# Altium PCB Solar_Charger2.PcbDoc
Units mil, origin at the board's own origin, x right, y up, seen from the top; angles counter-clockwise.
Board outline 3005 x 1655 mil, 2 copper layers (Top Layer, Bottom Layer); 24 components, 16 nets, 57 pads, 5 vias.
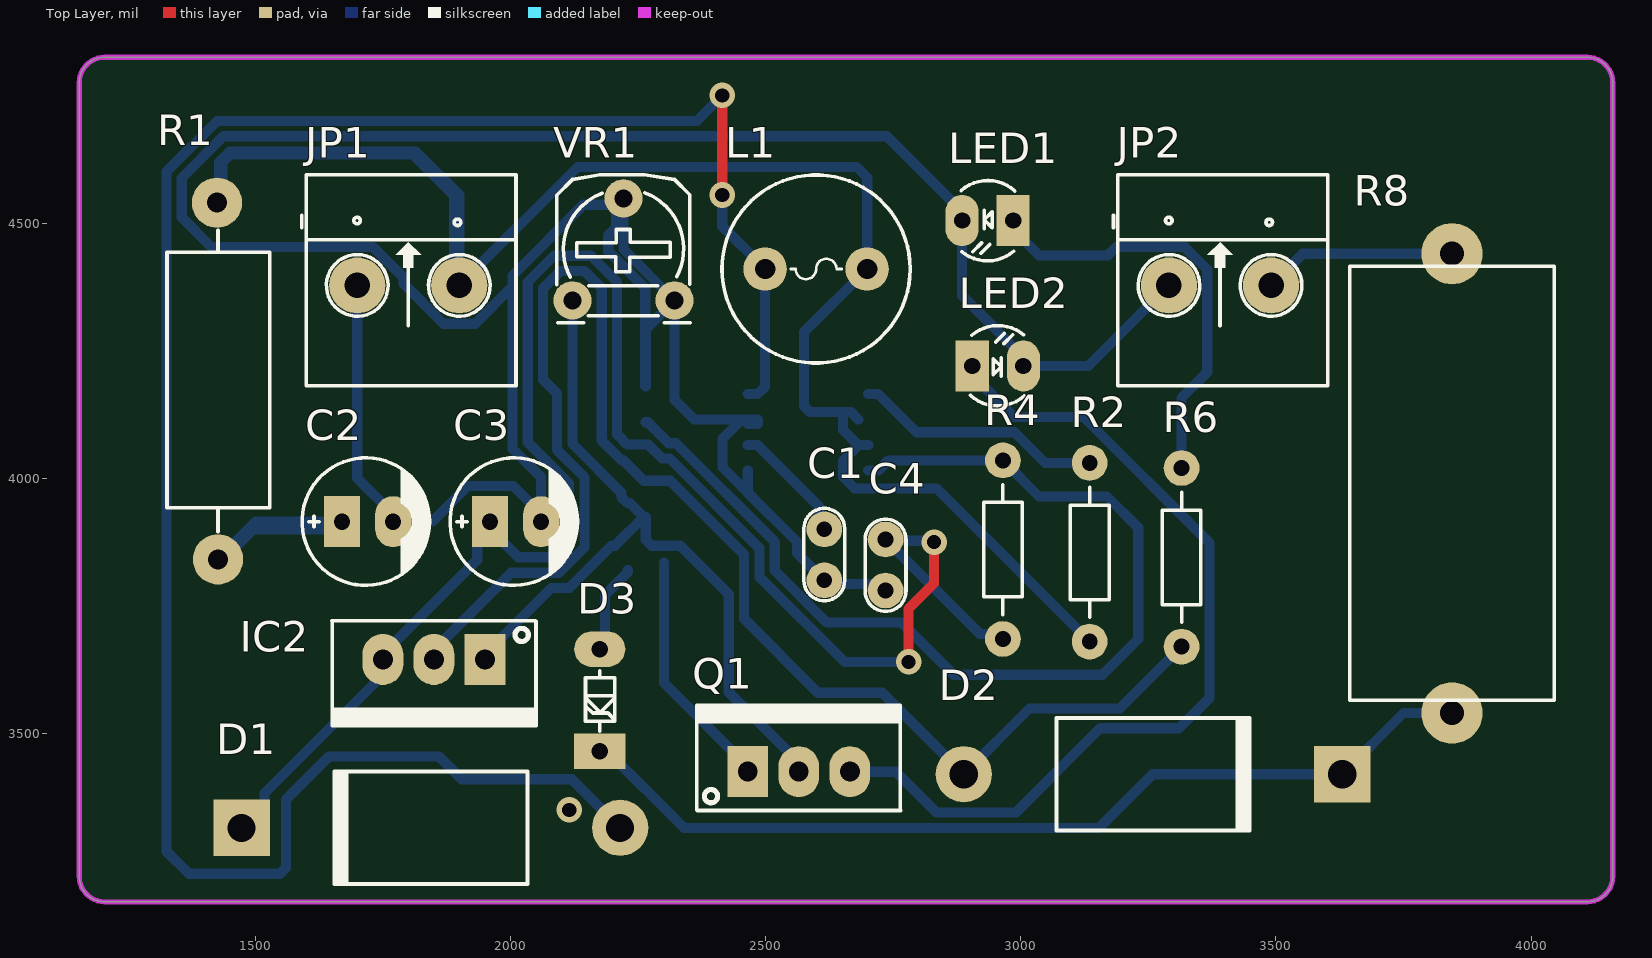
[diagram p0: Top Layer view]
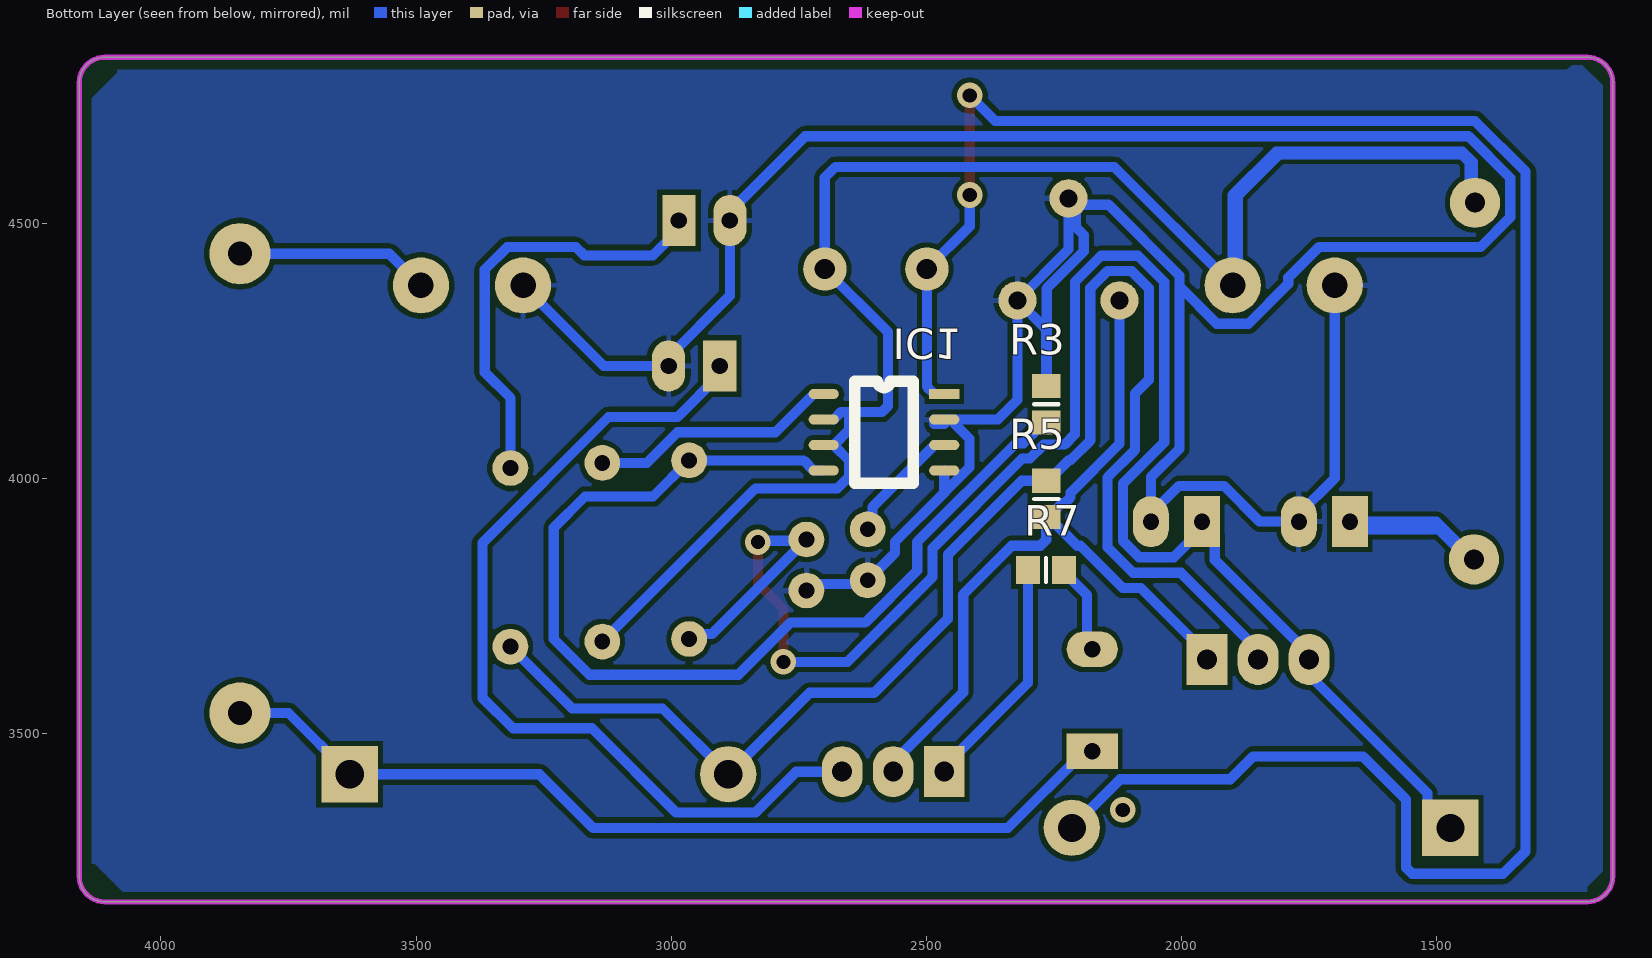
[diagram p1: Bottom Layer view, seen from below]
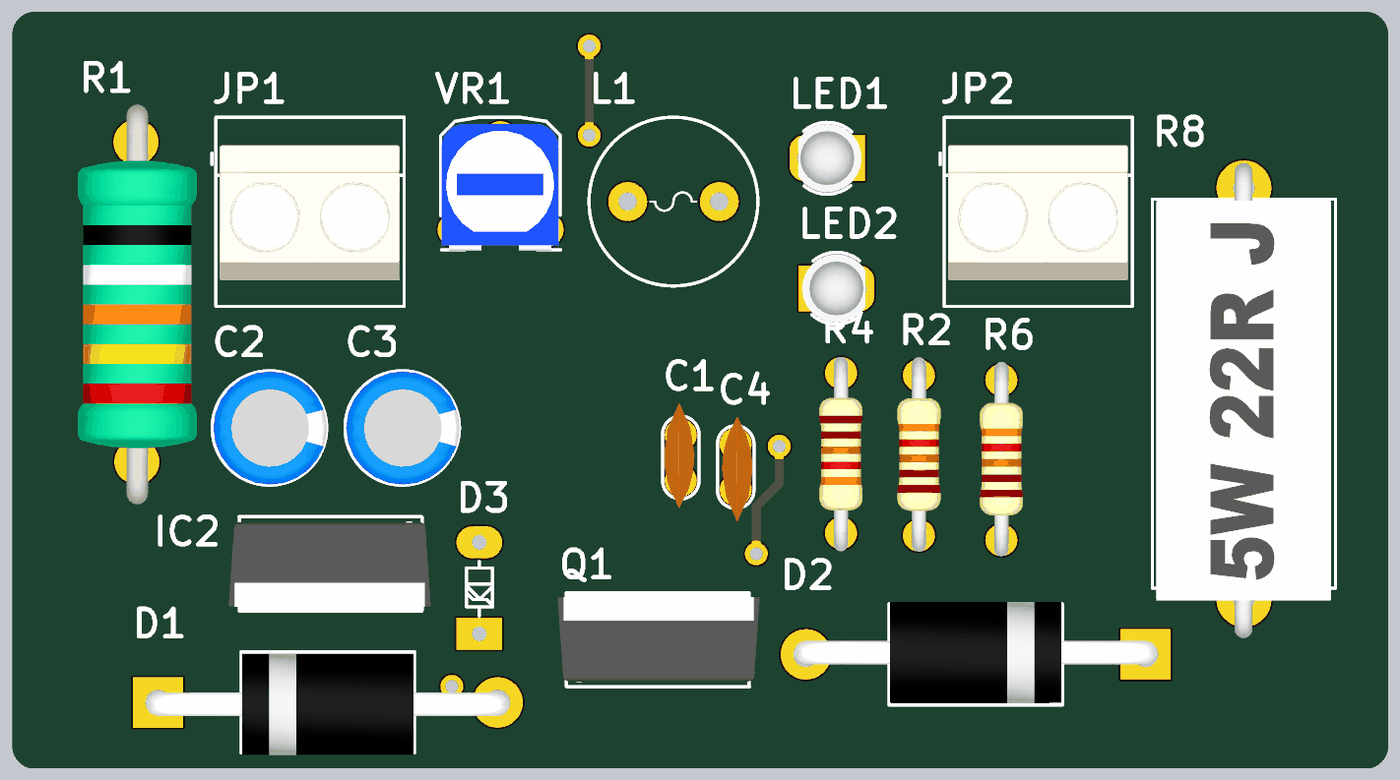
[diagram p2: 3D render of the assembled board from above, using the file's embedded part models]
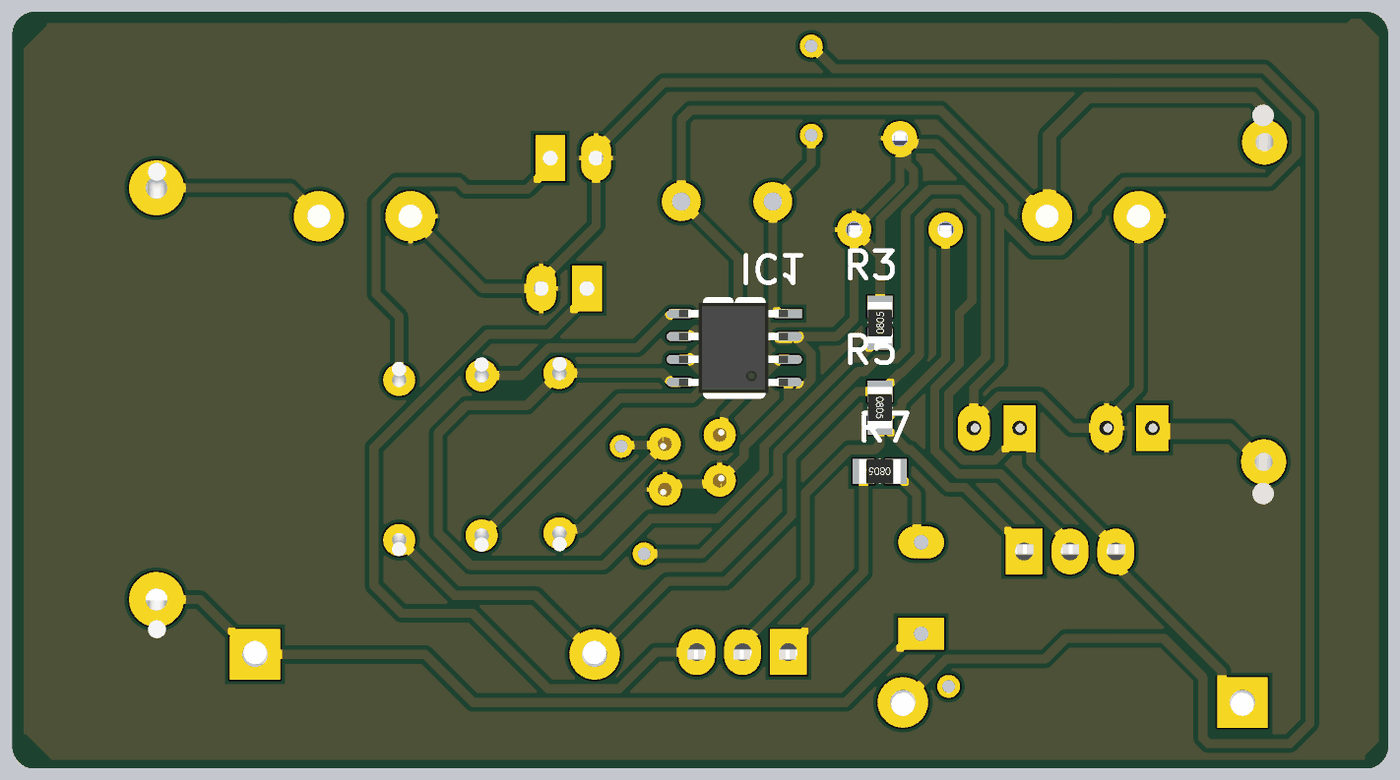
[diagram p3: 3D render of the assembled board from below, using the file's embedded part models]

## Layer stack, top to bottom
Top Solder: solder mask 0.4, Solder Resist, Dk 3.5
Top Layer: signal copper 1.4
Dielectric 1: dielectric 12.6, FR-4, Dk 4.8
Bottom Layer: signal copper 1.4
Bottom Solder: solder mask 0.4, Solder Resist, Dk 3.5

## Board outline
1205,3170 cw(c1205,3220) 1155,3220 1155,4775 cw(c1205,4775) 1205,4825 4110,4825 cw(c4110,4775) 4160,4775 4160,3220 cw(c4110,3220) 4110,3170

## Design rules (kind name [scope] priority, off if disabled: settings)
Clearance [All] p1: gap=10 ignorepadtopadclearanceinfootprint=FALSE except(0: Arc-Hole Track-Hole SMDPad-Hole THPad-Hole Via-Hole Fill-Hole Poly-Hole Region-Hole Text-Hole)
PolygonConnect [All] p1: connectstyle=Relief reliefconductorwidth=10 reliefentries=4 polygonreliefangle="90 Angle" airgapwidth=10
RoutingVias [All] p1: holewidth=28 width=50 viastyle="Through Hole" minholewidth=28 minwidth=50 maxholewidth=28 maxwidth=50
SilkToSolderMaskClearance [IsText] p1: minsilkscreentomaskgap=10 clearancetoexposedcopper=TRUE
SolderMaskExpansion [All] p1: expansion=4 istentingtop=FALSE
Width [All] p1: maxlimit=30 minlimit=15 preferedwidth=20
29 further rules are at their usual default settings.

## Components (designator, comment, footprint, x,y, rotation, side; value= is the part's Value field where it differs from the comment)
C1 "270pF" CN1 2615,3800 r90 top value=100pF
C2 "100uF" CP1/2.5 1670,3915 r0 top value="47uF/16 - 50V"
C3 "100uF" CP1/2.5 1960,3915 r0 top value="47uF/16 - 50V"
C4 "100 nF" CN1 2735,3880 r270 top value=100pF
D1 "1N5819" DO-201 2215,3315 r180 top
D2 "1N4007" DO-201 2888.27,3420 r0 top
D3 "6V/0.5W" DZ0.5A 2175,3665 r90 top value=3v3
IC1 "MC34063" SOP8 2465,4165 r0 bottom
IC2 "LM317" QTO-220 1950,3645 r180 top
JP1 "Header 2_1" HED2 1699.79,4377.86 r0 top value="Header 2"
JP2 "Header 2_1" HED2 3290.37,4377.86 r0 top value="Header 2"
L1 "330mH" L01 2598.96,4410 r180 top value="150 mH"
LED1 "LED" LED-3 2985,4505 r180 top value="LED 3 ly Single Colour"
LED2 "LED" LED-3 2905,4220 r0 top value="LED 3 ly Single Colour"
Q1 "BD139" QTO-220 2465,3425 r0 top
R1 "0.3 Ohm/2W" R2W 1427,3841 r90 top value="R2W - 47"
R2 "180 Ohm" R1/4W 3135,4030 r270 top value="R1/4W - 1K"
R3 "1k" 0805_Res 2265,4145 r90 bottom value="R1/4W - 1K"
R4 "4k" R1/4W 2965,3685 r90 top value="R1/4W - 1K"
R5 "1k" 0805_Res 2265,3959.57 r270 bottom value="R1/4W - 1K"
R6 "4k" R1/4W 3315,4020 r270 top value="R1/4W - 1K"
R7 "1k" 0805_Res 2265.43,3820 r0 bottom value="R1/4W - 1K"
R8 "R6W - 1k" R5W 3845,3540 r90 top value="R5W - 0,47R"
VR1 "1K" VR 2121.5,4348.39 r0 top value="VR 10K"

## Footprints (in the part's own frame and the unit in brackets; to place one, negate y for a bottom-side part, rotate by r counter-clockwise, add the part's x,y. Pads: shape width x height; smd on the part's side, far side on the other; paste and mask are expansions set on the pad)
0805_Res [mm] "Chip Resistor, Body 2.0x1.2mm, IPC Medium Density"
  rect 1.2x1.4 smd: 1(-0.9,0) 2(0.9,0)
  silkscreen extent 0,-0.6 0,0.6, body extent -1.15,-0.67 1.15,0.67, height 0.76
CN1 [mil]
  round 70 hole 31: 1(0,0) 2(100,0)
  silkscreen extent -40,-40 141,40, body extent -60,-30 170,37, height 265
CP1/2.5 [mil] "Tu hoa 33 >100 uF,50V, 220uF/16V,25V"
  rect 70x100 hole 32: 1(0,0)
  oval 70x100 hole 32: 2(100,0)
  silkscreen extent -78,-125 172,125, body extent -76,-124 172,124, height 422
DO-201 [mm] "Diode, Axial; Body 9.5 x 5.6 mm (LxDia. max), Lead Dia. 1.32 mm (max)"
  round 2.8 hole 1.4: 1(0,0)
  rect 2.8x2.8 hole 1.4: 2(18.84,0)
  silkscreen extent 4.62,-2.8 14.32,2.8, body extent -0.65,-2.72 19.49,2.92, height 5.82
DZ0.5A [mil] "Diode Zenner, W 80mil, L 300mil"
  oval 70x100 hole 32: 1(0,0)
  rect 70x100 hole 32: 2(-200,0)
  silkscreen extent -161,-29 -42,28
HED2 [mil] "Header 2, 2 pin, hight 300mil, Pin to Pin 200, Colour Green"
  round 110 hole 50: 1(0,0) 2(200,0)
  silkscreen extent -109,-197 311,217, body extent -92,-140 302,155, height 394
L01 [mil] "Inductor"
  round 85 hole 40: 1(-100,0) 2(100,0)
  silkscreen extent -184,-184 184,184
LED-3 [mil] "LED 2 PIN, 3ly Only colour"
  rect 65x100 hole 32: 1(0,0)
  oval 65x100 hole 32: 2(100,0)
  silkscreen extent -4,-78 102,79, body extent -25,-75 113,75, height 217
QTO-220 [mil] "TO-220 - 1-2-3"
  rect 80x100 hole 39: 1(0,0)
  oval 80x100 hole 39: 2(100,0) 3(200,0)
  silkscreen extent -100,-76 300,130, body extent -119,-64 322,121, height 755
R1/4W [mil] "R 1/4W, 2 Pin, 350mil"
  round 70 hole 31: 1(0,0) 2(350,0)
  silkscreen extent 48,-38 302,38, body extent -40,-47 386,47, height 111
R2W [mm] "R2W, 2 pin, 700mil"
  round 2.5 hole 1: 1(0,0) 2(17.755,0.051)
  silkscreen extent 1.37,-2.57 16.38,2.54, body extent -2.36,-3.33 19.84,3.27, height 8.3
R5W [mil] "R5W , 2 pin, 400 x 950mil"
  round 120 hole 47.24: 1(0,0) 2(900,0)
  silkscreen extent 25,-200 875,200, body extent -85,-190 955,192, height 363
SOP8 [mm]
  rect 1.5x0.5 smd: 1(0,0)
  oval 1.5x0.5 smd: 2(0,1.27) 3(0,2.54) 4(0,3.81) 5(6,3.81) 6(6,2.54) 7(6,1.27) 8(6,0)
  silkscreen extent 1.54,-0.64 4.46,4.44, body extent 0.03,-0.61 6.07,4.41, height 1.6
VR [mil] "Resistor Variable"
  round 75 hole 35: 1(0,0) 2(100,200) 3(200,0)
  silkscreen extent -31,-44 231,246, body extent -29,-46 227,232, height 295

## Part data
C1 C4: library part CN1, "Cap np  1pF - 472pF"
C2 C3: library part CP2, "C 47uF/50V , 220uF/16V", Description 1="470uF/6,3V - 330uF/10V - 220uF/16V", Description 2="100uF/25V - 35V - 47uF/50V - 22uF/100V", Description 3="33uF => 47uF/63V - 1uF => 4,7uF/160V", Description 4="1uF => 2,2uF/250V - 1uF/350V"
D3: library part DZ, "Diode Zenner"
IC1: library part SO8
IC2: "Adj Voltage +1.2 -> +37V"
JP1 JP2: "Header, 2-Pin", Manufacturer="Generic Components", Class=Connector
L1: library part L1, "Inductor"
LED1 LED2: "LED Single colour Green and Red"
R1: library part R2W, "Resistor 2W"
R2 R4 R6: library part R1/4W, "Resistor 1/4W"
R3 R5 R7: library part R, "Resistor 1/4W"
R8: library part R5W, "Resistor 5W"
VR1: library part VR1, "Var Resistor"

## Via types
v1: diameter 50, hole 28, Top Layer to Bottom Layer, 5 vias

## Nets (pads, with @x,y where several pads share a name; then routed paths per layer and width w, separated by ;. In a path a pad name is that pad's centre, name@x,y a point inside that pad or via, vN(x,y) a via of type N, cw(c..) or ccw(c..) an arc to the next point about the centre after c; other vN are vias at no path point)
GND: C1.1 C2.2 C3.2 C4.2 IC1.2 IC1.4 JP1.1 JP2.1 LED1.2 LED2.2 R3.2 VR1.2 VR1.3 | length 6546.3
  Bottom Layer w20: JP1.1 1699.79,4000.21 1770,3930 C2.2 1846.72,3915 1916.72,3985 2005,3985 C3.2@2060,3930 ; C3.2 2060,4001.85 2004,4057.85 2004,4376 ; VR1.2 2221.5,4448.39 VR1.3 ; IC1.2@2444.83,4106.72 2415.47,4077.36 2415.47,4021.21 2464.43,3972.26 2464.43,3971.12 ; IC1.4 2465,3971.69 2561.65,3875.03 2561.65,3853.35 C1.1 ; IC1.2@2465,4106.72 2484.53,4106.72 2484.53,4114.84 2484.37,4115 IC1.2 2444.83,4115 2360,4115 2321.5,4153.5 VR1.3 ; C1.1@2615,3792.5 2717.5,3792.5 C4.2@2720,3795 ; JP2.1 3132.51,4220 LED2.2 3005,4237.5 2885,4357.5 LED1.2 2885,4522.5 2737.5,4670 1437.57,4670 1355.79,4588.21 1355.79,4511.33 1414.26,4452.86 1730.86,4452.86 1790.83,4392.89 1790.83,4380.76 1868.73,4302.86 1930.86,4302.86 2004,4376 ; 2004,4376 2004,4397.06 2142.87,4535.93 2195.07,4535.93 2206.79,4524.21 2206.79,4492.03 2191.5,4476.74 2191.5,4444.56 2264,4372.06 2264,4181.43 R3.2 2265,4291.89 VR1.3
NetC1_2: C1.2 IC1.3 | length 238.5
  Bottom Layer w20: IC1.3 2484.37,4065 2605.43,3943.94 2605.43,3909.57 C1.2
NetC2_1: C2.1 R1.1 | length 273.7
  Bottom Layer w20: R1.1 1501,3915 C2.1
NetC3_1: C3.1 C4.1 D1.2 IC2.3 R4.1 | length 3513.2
  Top Layer w20: v1(2780,3640) 2780,3744.06 2830,3794.06 v1(2830,3875)
  Bottom Layer w20: D1.2 1517.97,3359.7 1517.97,3382.97 1738.52,3603.52 1738.52,3633.52 IC2.3 1750,3655 1935,3840 1935,3890 C3.1 1960,3900 2015,3845 2082.78,3845 2115,3877.22 2115,3989.28 2034,4070.28 2034,4384.63 2085.26,4435.89 2157.74,4435.89 2209,4384.63 2209,4086.1 2229.16,4065.94 2270.13,4065.94 2297.46,4038.62 2312.07,4038.62 2487.87,3862.82 2487.87,3806.92 2654.79,3640 v1(2780,3640) ; C4.1 C4.1@2737.5,3877.5 ; v1(2830,3875) 2827.5,3877.5 C4.1@2737.5,3877.5 ; R4.1 2955.43,3694.57 2920.43,3694.57 C4.1@2737.5,3877.5
NetD1_1: D1.1 IC1.1 L1.2 | length 4266.6
  Top Layer w20: v1(2415,4555) v1(2415,4750)
  Bottom Layer w20: D1.1 2120,3410 1904.32,3410 1859.32,3455 1645,3455 1560,3370 1560,3236.72 1548.28,3225 1370,3225 1325.79,3269.21 1325.79,4600.64 1425.15,4700 2365,4700 v1(2415,4750) ; v1(2415,4555) 2415,4493.96 L1.2 2498.96,4179.59 2484.37,4165 IC1.1
NetD2_1: D2.1 IC2.2 R5.1 R6.2 | length 2963.3
  Bottom Layer w20: IC2.2 1850,3663.28 2001.72,3815 2095.21,3815 2145,3864.79 2145,4001.71 2091.5,4055.21 2091.5,4165.51 2064,4193.01 2064,4372.21 2097.68,4405.89 2145.32,4405.89 2179,4372.21 2179,4073.68 2216.73,4035.94 2220.12,4035.94 2261.06,3995 2313.27,3995 2457.87,3850.4 2457.87,3724.35 2602.48,3579.74 2728.53,3579.74 D2.1 3017.12,3548.85 3193.85,3548.85 R6.2
NetD2_2: D2.2 D3.2 R8.1 | length 1825.4
  Bottom Layer w20: D3.2 2190,3465 2340.12,3314.88 3153.46,3314.88 3258.58,3420 D2.2 3750,3540 R8.1
NetD3_1: D3.1 R7.1 | length 192.8
  Top Layer w20: D3.1 D3.1@2190,3665
  Bottom Layer w20: D3.1 2185,3675 2185,3771.06 2230,3816.06 R7.1
NetIC1_5: IC1.5 R3.1 R4.2 | length 2041.5
  Bottom Layer w20: R3.1 2268.94,4109.57 2309.88,4068.62 2324.5,4068.62 2517.87,3875.25 2517.87,3819.35 2620.05,3717.17 2766.47,3717.17 2868.64,3615 3160,3615 3230,3685 3230,3903.28 3168.93,3964.36 3035.64,3964.36 R4.2 2740.59,4035 2720.59,4015 IC1.5
NetIC1_6: IC1.6 IC1.7 JP1.2 L1.1 R1.2 R2.2 | length 3081.6
  Bottom Layer w20: R1.2 1429.21,4544.21 1429.21,4619.21 1450,4640 1815,4640 1899.79,4555.21 JP1.2 2131.94,4610 2678.28,4610 2698.96,4589.32 L1.1 2575,4286.04 2575,4141.72 2586.72,4130 2651.69,4130 ; IC1.6@2681.69,4064.84 2651.69,4034.84 2651.69,4002.64 2674.33,3980 2835,3980 R2.2 ; IC1.7@2681.69,4115.16 2666.85,4130 2651.69,4130 ; IC1.6 2681.85,4065 2651.69,4095.16 2651.69,4130
NetIC1_8: IC1.8 R2.1 | length 489.7
  Bottom Layer w20: IC1.8 2720.59,4165 2795.59,4090 2987.78,4090 3047.78,4030 R2.1
NetIC2_1: IC2.1 Q1.2 R5.2 VR1.1 | length 1581.4
  Bottom Layer w20: IC2.1 1950,3655 2080,3785 2115.53,3785 2198.09,3867.56 2204.49,3867.56 R5.2@2261.06,3924.13 ; VR1.1 2121.5,4067.63 2217.44,3971.69 2217.44,3963.09 2229.16,3951.38 2233.82,3951.38 R5.2@2261.06,3924.13 ; Q1.2 2565,3443.28 2427.87,3580.41 2427.87,3772.46 2332.77,3867.56 2276.72,3867.56 2265,3879.27 R5.2 ; R5.2@2261.06,3924.13 R5.2 ; R5.2@2261.06,3924.13 R5.2
NetJP2_2: JP2.2 R8.2 | length 380.4
  Bottom Layer w20: JP2.2 3552.51,4440 R8.2
NetLED1_1: LED1.1 R6.1 | length 853.6
  Bottom Layer w20: LED1.1 2985,4487.5 3035.78,4436.72 3170.54,4436.72 3186.68,4452.86 3321.43,4452.86 3365.37,4408.92 3365.37,4207.87 3315,4157.5 R6.1
NetLED2_1: LED2.1 Q1.3 | length 1753.3
  Bottom Layer w20: Q1.3 2755.25,3425 2835.37,3344.88 2990.13,3344.88 3155.24,3510 3310,3510 3370,3570 3370,3872.78 3122.78,4120 2987.5,4120 2905,4202.5 LED2.1
NetQ1_1: Q1.1 R7.2 | length 478
  Bottom Layer w20: R7.2@2300.87,3835 R7.2 2300.87,3599.13 2465,3435 Q1.1
copper on no net:
  other v1: 2115,3350

## Polygon pours and split planes (outlines as drawn)
GND on Bottom Layer "GND_L02_P000" (solid, pour order 0): 1225,4820 1175,4770 1175,3230 1205,3200 1205,3190 4075,3190 4130,3245 4135,3245 4135,4745 4085,4795 4085,4800 1245,4800

## Keep-outs
Keep-Out Layer:
  lines w10: 1155,3220 ccw(c1205,3220) 1205,3170 4110,3170 ccw(c4110,3220) 4160,3220 4160,4775 ccw(c4110,4775) 4110,4825 1235,4825 1205,4825 ccw(c1205,4775) 1155,4775 1155,3220

## Other copper
Bottom Layer:
  region net NetC2_1: 1427,3841 1501,3915 1670,3915 1670,3885 1665,3890 1500,3890 1440,3830
  region net NetIC1_6: 1899.79,4377.86 1899.79,4555.21 1899.58,4555 1880,4555 1880,4380 1882.14,4377.86
  region net NetIC1_6: 1899.79,4377.86 1899.79,4555.21 1815,4640 1450,4640 1425,4615 1425,4540 1450,4540 1445,4545 1445,4615 1455,4625 1805,4625 1890,4540 1890,4375